# Altium PCB PCB2.PcbDoc
Units mm, origin at the board's own origin, x right, y up, seen from the top; angles counter-clockwise.
Board outline 101.25 x 88.75 mm, 2 copper layers (Top Layer, Bottom Layer); 27 components, 43 nets, 144 pads, 11 vias.
Unrouted connection lines stored in the file: 2.
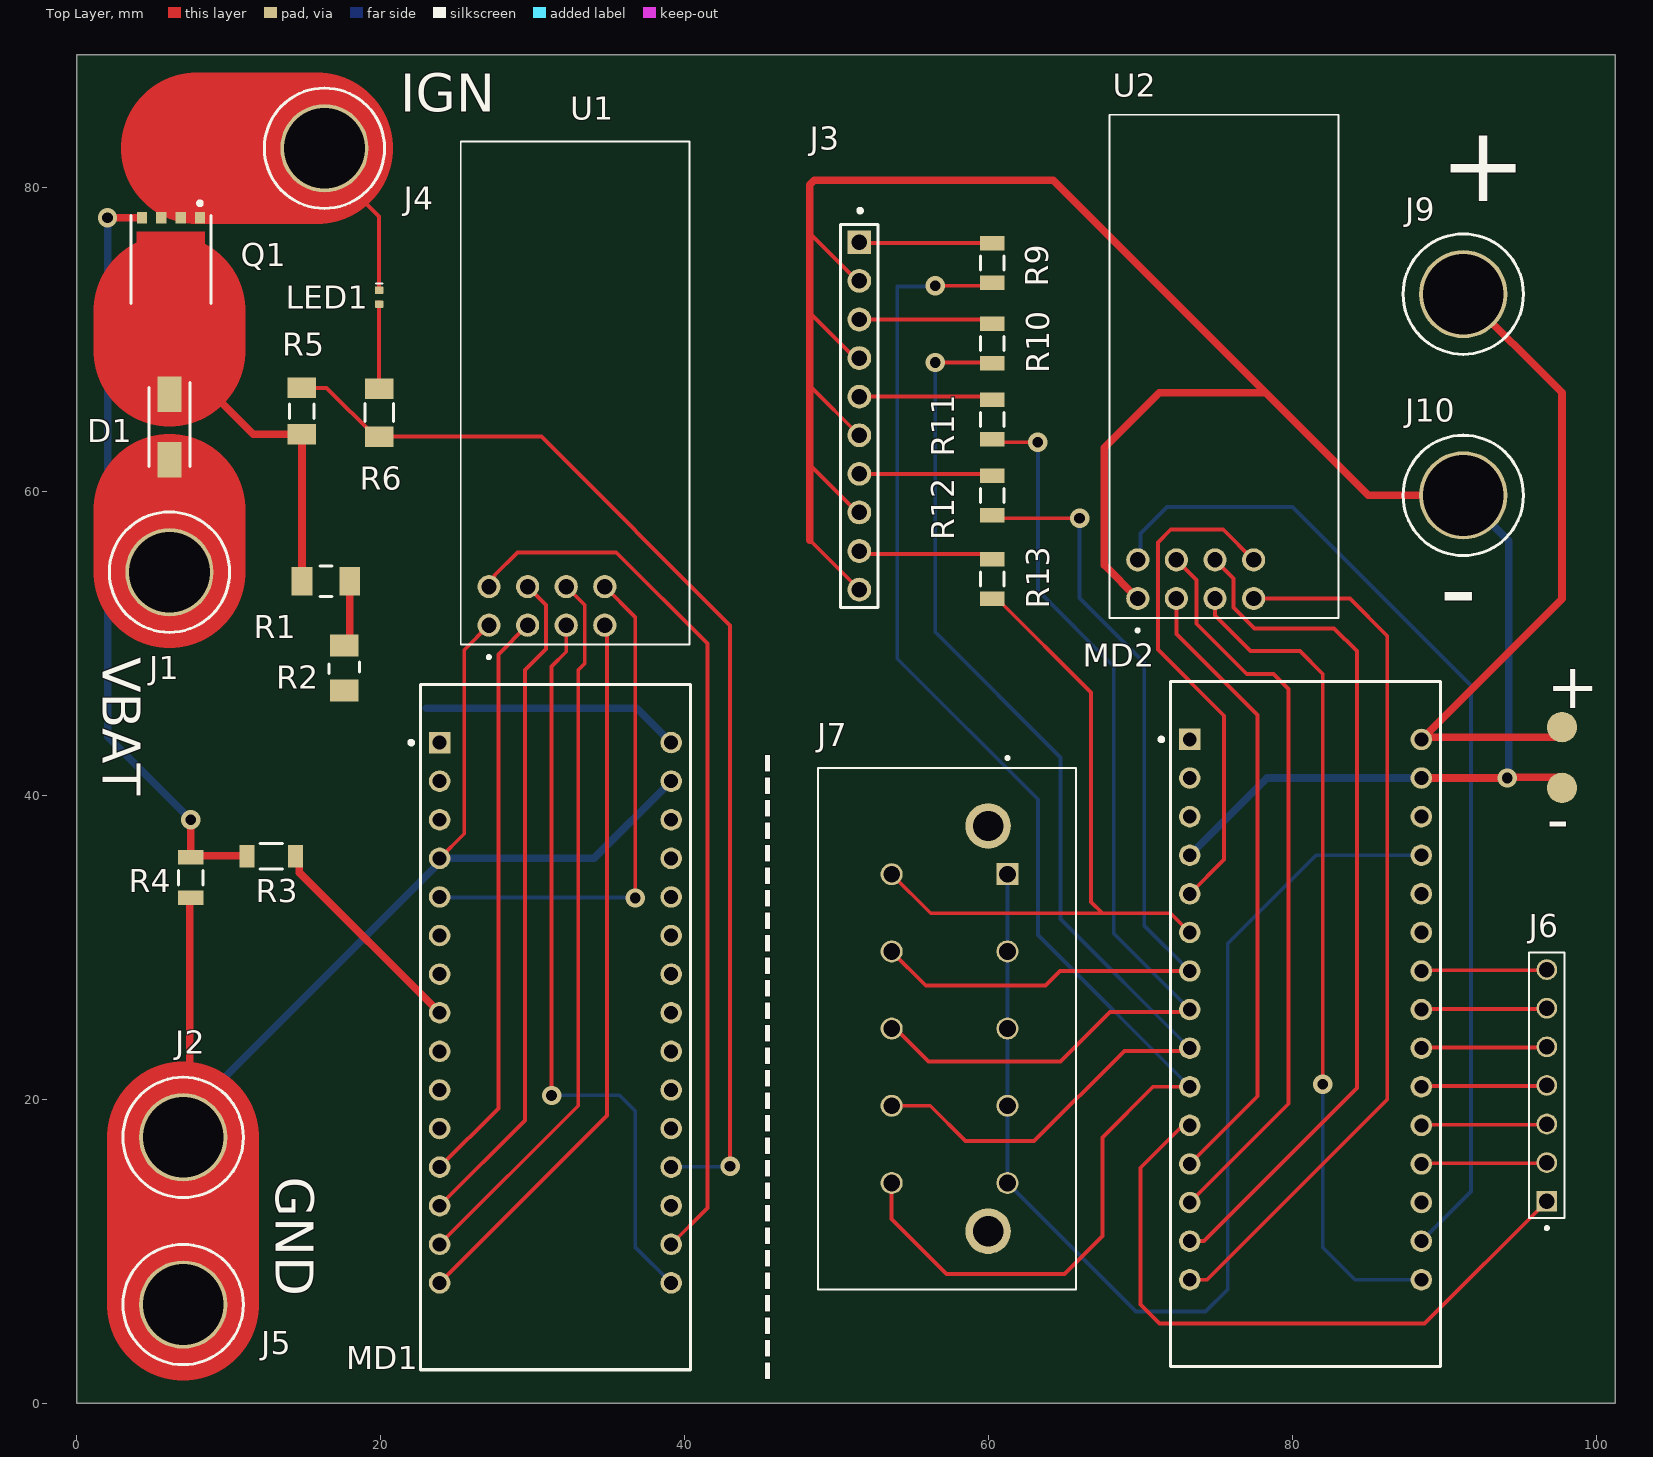
[diagram p0: Top Layer view]
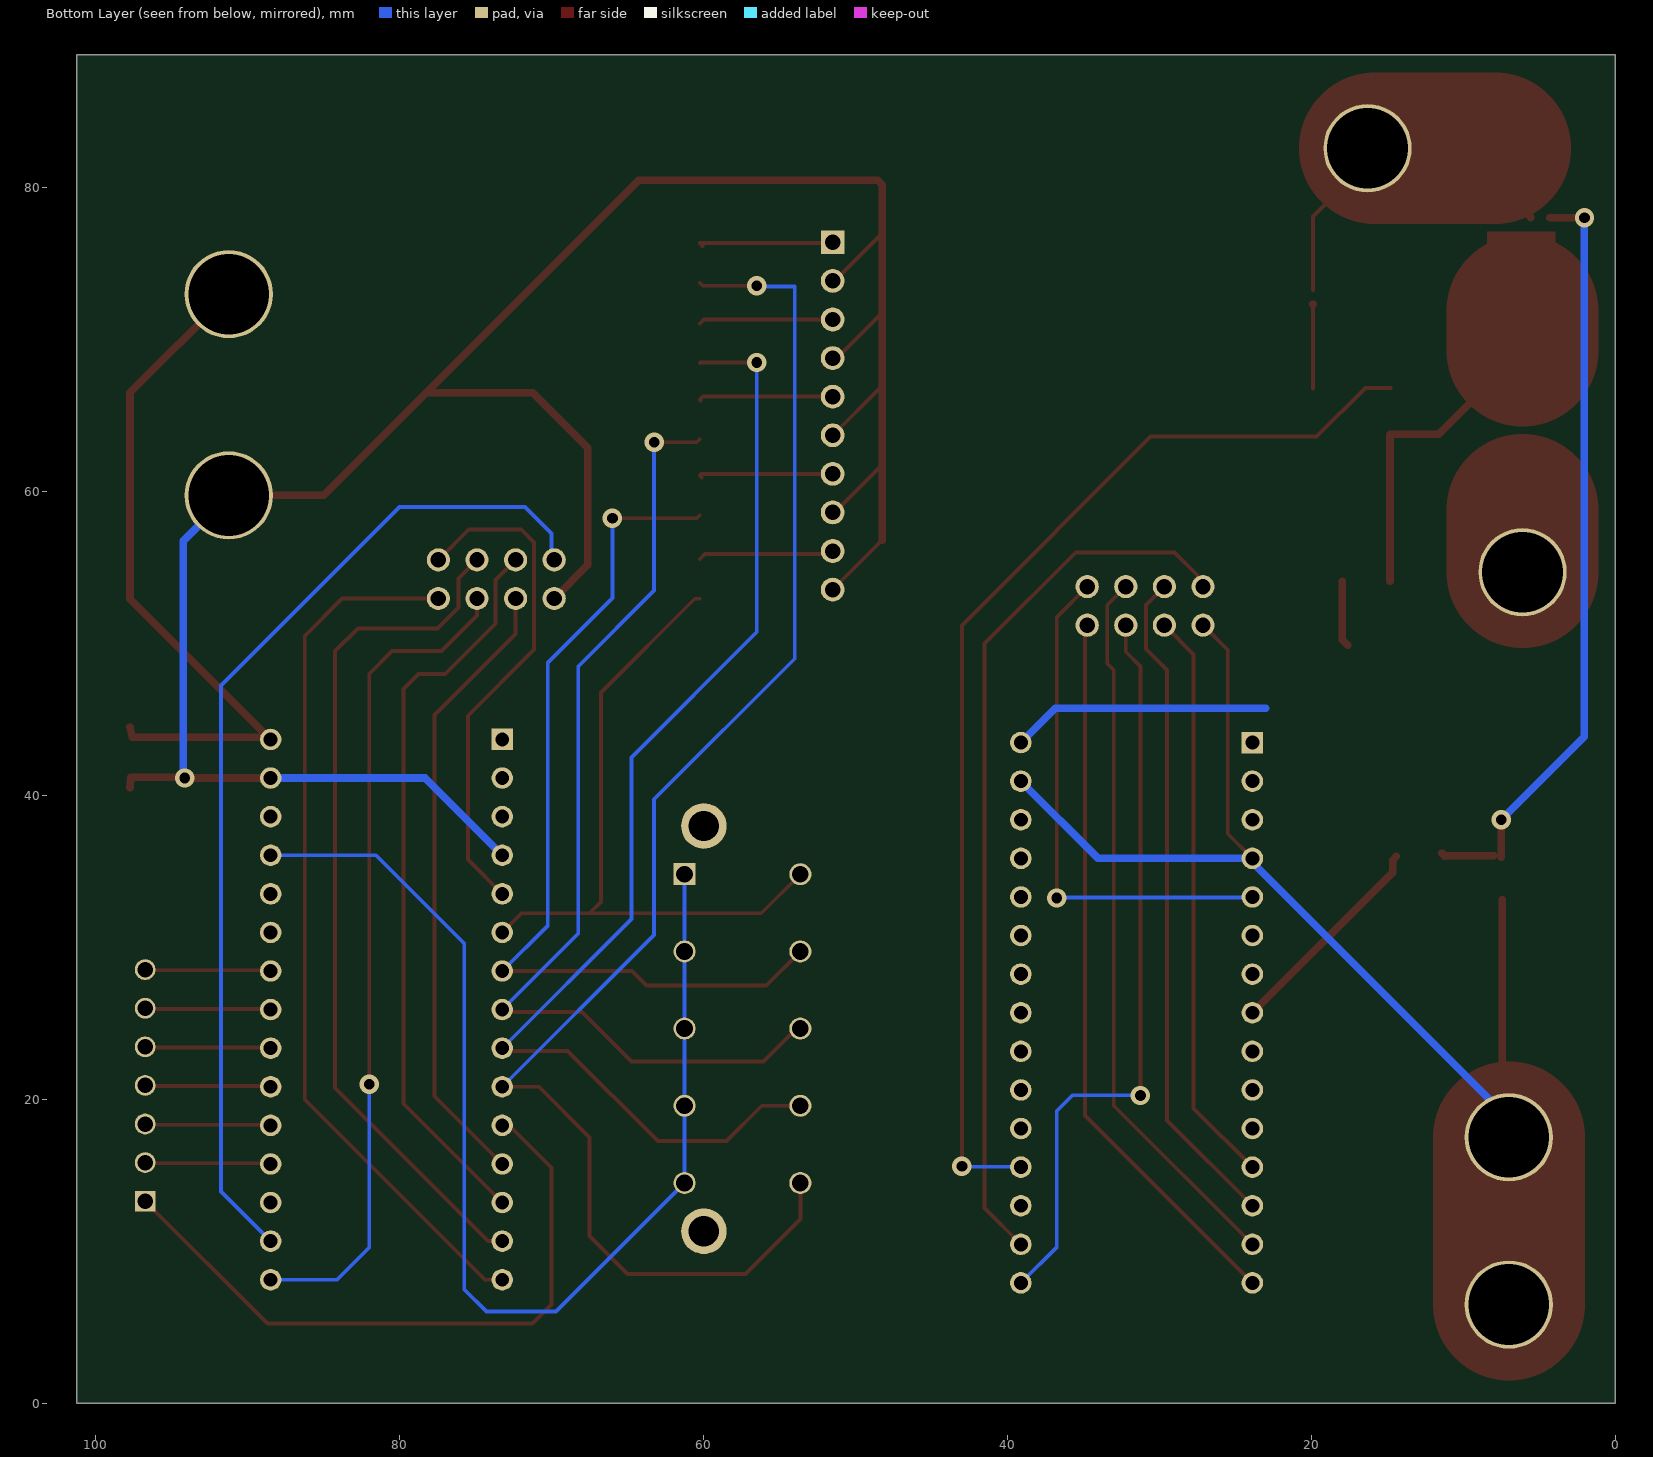
[diagram p1: Bottom Layer view, seen from below]
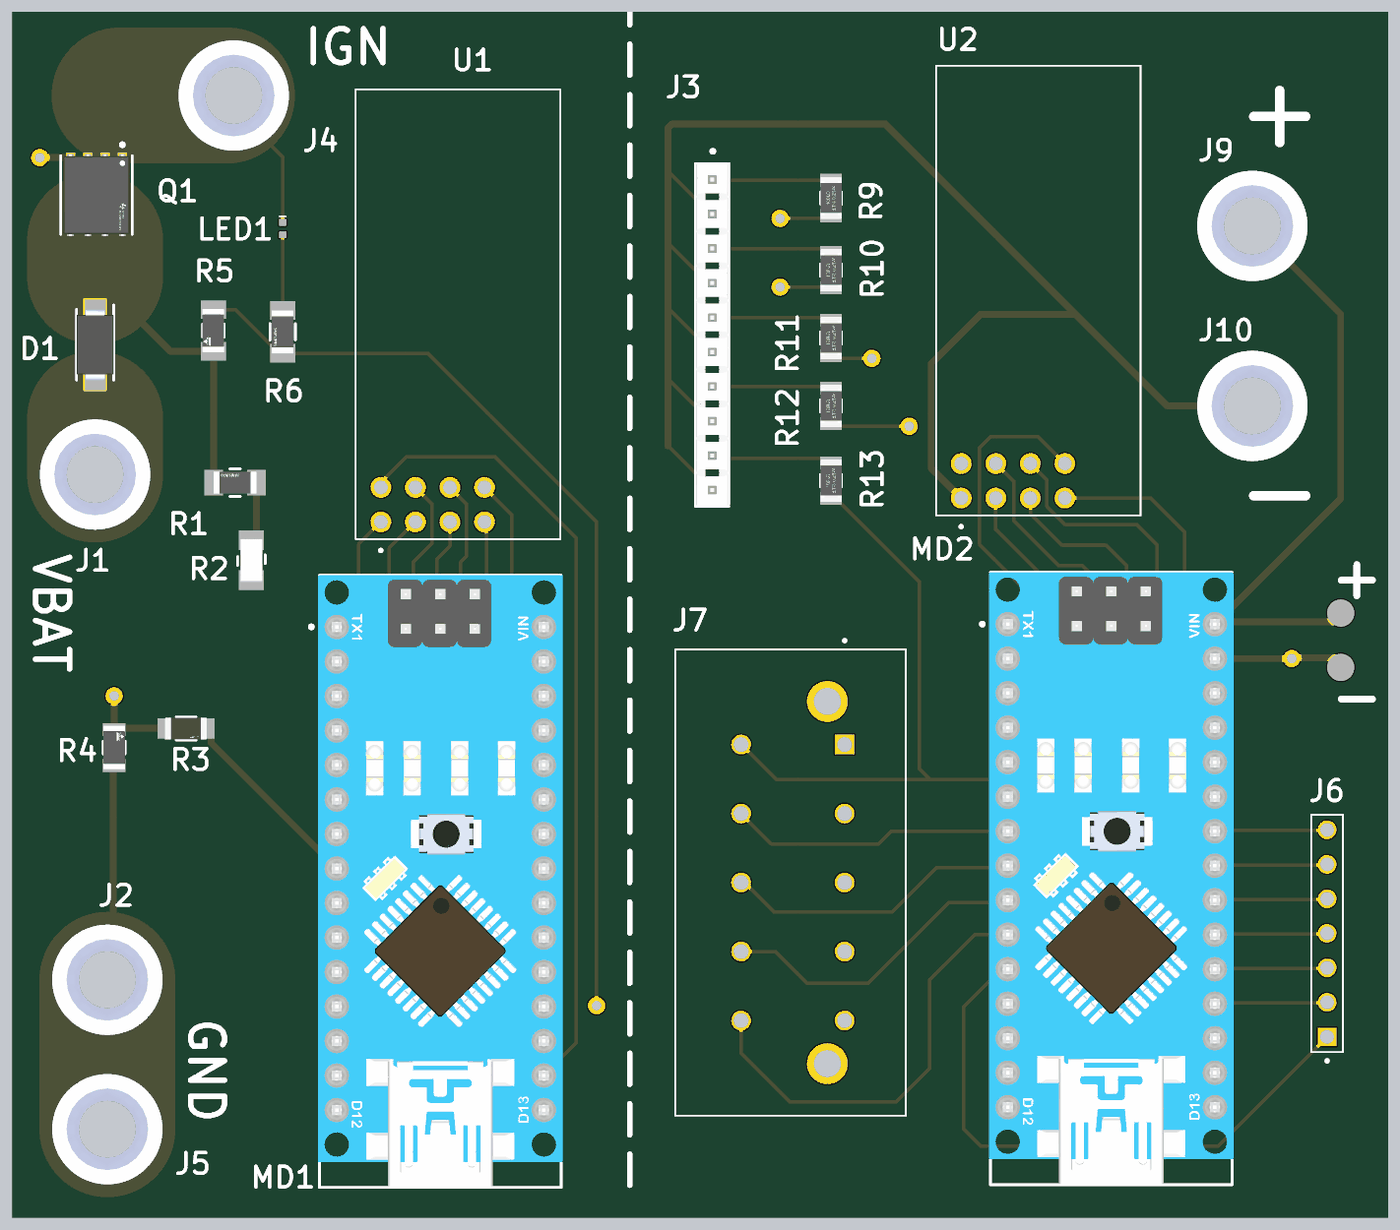
[diagram p2: 3D render of the assembled board from above, using the file's embedded part models]

## Layer stack, top to bottom
Top Solder: solder mask 0.0102, Solder Resist, Dk 3.5
Top Layer: signal copper 0.0356
Dielectric 1: dielectric 0.32, FR-4, Dk 4.8
Bottom Layer: signal copper 0.0356
Bottom Solder: solder mask 0.0102, Solder Resist, Dk 3.5

## Board outline
0,0 101.25,0 101.25,88.75 0,88.75

## Design rules (kind name [scope] priority, off if disabled: settings)
Clearance [All] p1: gap=0.254 ignorepadtopadclearanceinfootprint=FALSE except(0.127: Arc-Arc Arc-Track Track-Track SMDPad-SMDPad; 0.2: Arc-SMDPad Track-SMDPad; 0.33: Arc-THPad Track-THPad; 0.5: SMDPad-THPad SMDPad-Hole THPad-THPad THPad-Via THPad-Hole Via-Via Via-Hole)
HoleSize [All] p1: absolutevalues=TRUE maxlimit=10 minlimit=0.025 maxpercent=80.000 minpercent=20.000
PolygonConnect [All] p1: connectstyle=Direct reliefconductorwidth=0.254 reliefentries=4 polygonreliefangle="90 Angle" airgapwidth=0.254
RoutingVias [All] p1: holewidth=0.711 width=1.27 viastyle="Through Hole" minholewidth=0.711 minwidth=1.27 maxholewidth=0.711 maxwidth=1.27
SolderMaskExpansion [All] p1: expansion=0.102 istentingtop=FALSE
SupplyNets "Schematic Supply Nets_5" [InNet('GND')] p1: voltage=0.000
SupplyNets "Schematic Supply Nets_4" [InNet('+12')] p2: voltage=0.000
SupplyNets "Schematic Supply Nets_3" [InNet('VCC')] p3: voltage=0.000
SupplyNets "Schematic Supply Nets_2" [InNet('GND2')] p4: voltage=0.000
SupplyNets "Schematic Supply Nets_1" [InNet('VSS')] p5: voltage=0.000
SupplyNets "Schematic Supply Nets" [InNet('LOAD')] p6: voltage=0.000
Width [All] p1: maxlimit=10 minlimit=0.254 preferedwidth=1 minimp=50.000000 maximp=50.000000 favimp=50.000000
29 further rules are at their usual default settings.

## Classes and differential pairs
component class Sheet2: J3 J6 J7 J9 J10 MD2 R9 R10 R11 R12 R13 U2
component class Sheet1: D1 J1 J2 J4 J5 LED1 MD1 Q1 R1 R2 R3 R4 R5 R6 U1

## Components (designator, comment, footprint, x,y, rotation, side; value= is the part's Value field where it differs from the comment)
D1 "SS14" DIOM5227X270N 6.1,64.25 r270 top
J1 "575-8" KSTN-575-8 6.1,54.7 r0 top
J2 "575-8" KSTN-575-8 7,17.5 r0 top
J3 "4-644456-0" FP-4-644456-0-MFG 51.5,64.98 r90 top
J4 "575-8" KSTN-575-8 16.3,82.6 r0 top
J5 "575-8" KSTN-575-8 7,6.5 r0 top
J6 "3-644456-7" TE_3-644456-7 96.75,13.3 r90 top
J7 "3-917657-3" TE_3-917657-3 61.25,34.82 r270 top
J9 "575-8" KSTN-575-8 91.25,73 r0 top
J10 "575-8" KSTN-575-8 91.25,59.75 r0 top
LED1 "QBLP595-IB" QTB-QBLP595_V 19.9,72.8 r270 top
MD1 "A000005" FP-A000005-MFG 31.5,24.75 r0 top
MD2 "A000005" FP-A000005-MFG 80.87,24.957 r0 top
Q1 "CSD17579Q5A" FP-DQJ0008A-MFG 6.2,75.275 r270 top
R1 "RC3216F201CS" FP-RC3216-IPC_A 16.4,54.1 r180 top value=200
R2 "MCA12060C1001FP500" FP-MCA1206-IPC_A 17.6,48.4 r90 top value=1k
R3 "RT1206FRE07499RL" FP-RT1206-MFG 12.8,36 r0 top value=499R
R4 "CRCW120610K0FKEA" FP-CRCW1206-e3-IPC_C 7.5,34.6 r90 top
R5 "CRCW1206470RJNEA" FP-CRCW1206-e3-IPC_A 14.8,65.3 r270 top
R6 "RC3216J122CS" FP-RC3216-IPC_A 19.9,65.2 r270 top
R9 "CRGCQ1206J330R" FP-CRGCQ1206-IPC_C 60.25,75.051 r90 top value=330Ω
R10 "CRGCQ1206J330R" FP-CRGCQ1206-IPC_C 60.25,69.75 r90 top value=330Ω
R11 "CRGCQ1206J330R" FP-CRGCQ1206-IPC_C 60.25,64.75 r90 top value=330Ω
R12 "CRGCQ1206J330R" FP-CRGCQ1206-IPC_C 60.25,59.75 r90 top value=330Ω
R13 "CRGCQ1206J330R" FP-CRGCQ1206-IPC_C 60.25,54.25 r90 top value=330Ω
U1 "NRF24L01P-MODULE-PCB" XCVR_NRF24L01P-MODULE-PCB 32.799,66.494 r90 top
U2 "NRF24L01P-MODULE-PCB" XCVR_NRF24L01P-MODULE-PCB 75.5,68.25 r90 top

## Footprints (in the part's own frame and the unit in brackets; to place one, negate y for a bottom-side part, rotate by r counter-clockwise, add the part's x,y. Pads: shape width x height; smd on the part's side, far side on the other; paste and mask are expansions set on the pad)
DIOM5227X270N [mm]
  rect 2.35x1.55 smd: 1(-2.15,0) 2(2.15,0)
  silkscreen extent -2.93,-1.36 2.6,1.36, body extent -2.6,-1.36 2.6,1.36, height 2.5
FP-4-644456-0-MFG [mil]
  rect 61.65x61.65 hole 40 paste-99999 mask+0: 1(450,0)
  round 61.65 hole 40 paste-99999 mask+0: 2(350,0) 3(250,0) 4(150,0) 5(50,0) 6(-50,0) 7(-150,0) 8(-250,0) 9(-350,0) 10(-450,0)
  silkscreen extent -497,-49 537,49, body extent -500,-52 500,52, height 10
FP-A000005-MFG [mil]
  rect 55.67x55.67 hole 35.98 paste-99999 mask+0: 1(-300,737.5)
  round 55.67 hole 35.98 paste-99999 mask+0: 2(-300,637.5) 3(-300,537.5) 4(-300,437.5) 5(-300,337.5) 6(-300,237.5) 7(-300,137.5) 8(-300,37.5) 9(-300,-62.5) 10(-300,-162.5) 11(-300,-262.5) 12(-300,-362.5) 13(-300,-462.5) 14(-300,-562.5) 15(-300,-662.5) 16(300,-662.5) 17(300,-562.5) 18(300,-462.5) 19(300,-362.5) 20(300,-262.5) 21(300,-162.5) 22(300,-62.5) 23(300,37.5) 24(300,137.5) 25(300,237.5) 26(300,337.5) 27(300,437.5) 28(300,537.5) 29(300,637.5) 30(300,737.5)
  silkscreen extent -379,-888 350,887, body extent -354,-891 354,891, height 10
FP-CRCW1206-e3-IPC_A [mm]
  rect 1.356x1.858 smd paste+0 mask+0: 1(-1.526,0) 2(1.526,0)
  silkscreen extent -0.47,-0.8 0.47,0.8, body extent -2.7,-1.43 2.7,1.43, height 0.25
FP-CRCW1206-e3-IPC_C [mm]
  rect 0.956x1.658 smd paste+0 mask+0: 1(-1.326,0) 2(1.326,0)
  silkscreen extent -0.47,-0.8 0.47,0.8, body extent -1.9,-0.97 1.9,0.97, height 0.25
FP-CRGCQ1206-IPC_C [mm]
  rect 0.956x1.61 smd paste+0 mask+0: 1(-1.301,0) 2(1.301,0)
  silkscreen extent -0.45,-0.78 0.45,0.78, body extent -1.88,-0.95 1.88,0.95, height 0.25
FP-DQJ0008A-MFG [mm]
  rect 0.75x0.675 smd paste-1000 mask+0: 1(-2.752,1.905) 2(-2.752,0.635) 3(-2.752,-0.635) 4(-2.752,-1.905)
  round 0.025 smd paste-1000 mask+0: 5-6-7-8(0.275,-0.1)
  Top Layer region: -0.614,2.226 -0.614,2.226 3.131,2.226 3.131,1.551 2.476,1.551 2.476,0.956 3.131,0.956 3.131,0.281 2.476,0.281 2.476,-0.314 3.131,-0.314 3.131,-0.989 2.476,-0.989 2.476,-1.584 3.131,-1.584 3.131,-2.259 -1.819,-2.259 -1.819,2.226
  silkscreen extent -3.82,-2.63 2.9,2.63, body extent -3.23,-2.6 3.23,2.6, height 0.25
FP-MCA1206-IPC_A [mm]
  rect 1.456x1.858 smd paste+0 mask+0: 1(-1.476,0) 2(1.476,0)
  silkscreen extent -0.38,-1.02 0.38,1.02, body extent -2.7,-1.43 2.7,1.43, height 0.25
FP-RC3216-IPC_A [mm]
  rect 1.355x1.858 smd paste+0 mask+0: 1(-1.576,0) 2(1.576,0)
  silkscreen extent -0.38,-1.02 0.38,1.02, body extent -2.75,-1.43 2.75,1.43, height 0.25
FP-RT1206-MFG [mm]
  rect 1x1.5 smd paste+0 mask+0: 1(-1.6,0) 2(1.6,0)
  silkscreen extent -0.73,-0.85 0.72,0.85, body extent -2.2,-0.95 2.2,0.95, height 0.25
KSTN-575-8 [mm] "Banana Jack, Dia 7.92 mm"
  round 5.81 hole 5.31: 1(0,0)
  silkscreen extent -3.96,-3.96 3.96,3.96, body extent -3.96,-3.96 3.96,3.96, height 2.36
QTB-QBLP595_V [mm] "SMD, 2-Leads, Body 1x0.5mm"
  rrect25% 0.5x0.55 smd: 1(-0.455,0) 2(0.455,0)
  silkscreen extent -0.9,-0.2 -0.9,0.2, body extent -0.5,-0.25 0.5,0.25, height 0.5
TE_3-644456-7 [mm]
  rect 1.37x1.37 hole 1.02: 1(0,0)
  round 1.37 hole 1.02: 2(2.54,0) 3(5.08,0) 4(7.62,0) 5(10.16,0) 6(12.7,0) 7(15.24,0)
  silkscreen extent -1.87,-1.17 16.36,1.17
TE_3-917657-3 [mm]
  rect 1.45x1.45 hole 1.1: A1(0,0)
  round 1.45 hole 1.1: A2(5.08,0) A3(10.16,0) A4(15.24,0) A5(20.32,0) B1(0,-7.62) B2(5.08,-7.62) B3(10.16,-7.62) B4(15.24,-7.62) B5(20.32,-7.62)
  round 3 hole 2: S1(-3.175,-1.27) S2(23.495,-1.27)
  silkscreen extent -7.75,-12.47 27.32,4.5
XCVR_NRF24L01P-MODULE-PCB [mil]
  round 60 hole 40: 1(-601.75,223.19) 2(-501.75,223.19) 3(-601.75,123.19) 4(-501.75,123.19) 5(-601.75,23.19) 6(-501.75,23.19) 7(-601.75,-76.81) 8(-501.75,-76.81)
  silkscreen extent -688,-297 652,296

## Part data
D1: library part CMP-004-00031-2, "Diode Schottky 40 V 1A Surface Mount DO-214AC (SMA)", Case/Package="SMA-2 ON Semiconductor", Check_prices=https://www.snapeda.com/parts/SS14/Onsemi/view-part/?ref=eda, Component Type=Standard, Design Item ID=SS14, MF="ON Semiconductor", MP=SS14, Pins=2, SnapEDA_Link=https://www.snapeda.com/parts/SS14/Onsemi/view-part/?ref=snap, Source=SS14.SchLib
J1 J2 J4 J5 J9 J10: library part CMP-1672-00007-5, "Non-Insulated Jack, Through Hole, RoHS, Bulk", Manufacturer=Keystone, ComponentLink1Description="Manufacturer URL", ComponentLink1URL=http://www.keyelco.com/, ComponentLink2Description=Datasheet, ComponentLink2URL=http://www.keyelco.com/product-pdf.cfm?p=2379, DatasheetVersion="Rev. B, 11/1994", Mounting Technology="Through Hole", PackageDescription="1-Pin Through Hole Device, Dia 7.92 mm", PackageReference=575-8
J3: library part CMP-015-000000-2, "Conn Unshrouded Header HDR 10 POS 2.54mm Solder ST Top Entry Thru-Hole Bag/Box", Color=Natural, Contact Current Rating=5A, Contact Resistance=6mR, Flammability Rating="UL94 V-0", Max Operating Temperature=221°C, Max Voltage Rating (AC)=250V, Min Operating Temperature=-67°C, Package=None, Package Quantity=500, Approvals=CSA, Availability=Unavailable, Backwall/Post Interruptions="No (Without)", Circuit Application=Signal, Component Type=Standard, Connector System=Wire-to-Board, Connector Type=Plug,Header,Pin, Contact Gender=Male, Contact Material="Copper Alloy", Contact Mating Length=7.49mm, Contact Plating=Tin,Matte, Contact Retention="No (Without)", Contact Shape=Square, Contact Style=Straight, Contact Type="Male Pin", Current Rating=5A, Depth=2.33mm, Design Item ID=4-644456-0, ELV=Compliant, Gender=Male, Height=10.03mm, Housing Color=Natural, Housing Material=Polyester, Lead Free="Lead Free", Length=25.1mm, Mating Alignment="No (Without)", Mating Retention="No (Without)", Mounting Technology="Through Hole", MP=4-644456-0, Number of Contacts=10, Number of Positions=10, Number of Rows=1, Operating Supply Voltage=250V, Orientation=Straight, Packaging=Bag, PCB Mount Alignment="No (Without)", PCB Mount Retention=Without, PCB Mounting Orientation=Vertical, PCB Thickness=0.063inch, Pin Count=10, Pitch=2.54mm, Plating=Tin, Plating Thickness=1.27um, Price=None, Radiation Hardening=No, RoHS Compliant=Yes, Sealable="No (Without)", Series=MTA-100, Shrouded="No (Without)", Source=4-644456-0.SchLib, Strain Relief="No (Without)", Tail Length=0.11inch, Termination=Solder, Underplate Material=Nickel, Voltage Rating=250V, Voltage Rating (AC)=250V
J6: library part CMP-002-00071-2, "Header; 0.1 in. (Centerline); White (Housing); Polyester; 7; UL 94V-0", Case/Package=None, Max Operating Temperature=221°C, Min Operating Temperature=-67°C, Voltage Rating=250V, Component Type=Standard, Connector Type=Plug,Header,Pin, Design Item ID=3-644456-7, Digi-Key_Part_Number=A31117-ND, DigiKey-Purchase-URL=https://snapeda.com/shop?store=DigiKey&id=554533, EU_RoHS_Compliance=Compliant, Gender=Male, MF="TE Connectivity", Mounting Technology="Through Hole", Mouser-Purchase-URL=https://snapeda.com/shop?store=Mouser&id=554533, MP=3-644456-7, Pins=7, RoHS Compliant=Yes, SnapEDA_Link=https://www.snapeda.com/parts/3-644456-7/TE%20Connectivity%20AMP%20Connectors/view-part/554533/?ref=snap, Source=3-644456-7.SchLib
J7: library part CMP-007-000000-1, Package=None, Availability=Unavailable, Component Type=Standard, Design Item ID=3-917657-3, MP=3-917657-3, Pin Count=12, Price=None, Source=3-917657-3.SchLib
LED1: library part CMP-007-00042-3, "Chip LED 0402, Blue, 0.02 A, 3.1 to 3.7 V, -40 to 80 degC, 2-Pin SMD, RoHS, Tape and Reel", Case/Package=0402, Colour=Blue, Mounting Technology=SMT, Pins=2, RoHS Compliant=Yes
MD1 MD2: library part CMP-189986-000002-1, "ARDUINO NANO ATMEGA328 EVAL BRD", Operating Supply Voltage=12V, Package Quantity=50, Core Architecture=AVR, Data Bus Width=8b, Evaluation Kit=Yes, Height=0.25inch, Interface=I2C, Length=7inch, Number of Bits=8, Packaging=Bulk, REACH SVHC="No SVHC", Series="AVR® ATmega", Weight=0.358383oz, Width=5inch
Q1: library part CMP-013-00034-3, "30V, N ch NexFET MOSFET, single SON5x6, 13.3mOhm 8-VSONP", Case/Package="VSONP-8 Texas Instruments", Peak Reflow Temperature (Cel)=260°C, Availability="In Stock", Check_prices=https://www.snapeda.com/parts/CSD17579Q5A/Texas+Instruments/view-part/?ref=eda, Component Type=Standard, Design Item ID=CSD17579Q5A, JESD-609 Code=e3, MF="Texas Instruments", Moisture Sensitivity Level=1, MP=CSD17579Q5A, Pins=8, Price=None, Purchase-URL=https://pricing.snapeda.com/search/part/CSD17579Q5A/?ref=eda, Reach SVHC Compliant=No, RoHS Compliant=Yes, SnapEDA_Link=https://www.snapeda.com/parts/CSD17579Q5A/Texas+Instruments/view-part/?ref=snap, Source=CSD17579Q5A.SchLib, Terminal Finish=Tin
R1: library part CMP-009-00180-1, "Fixed Resistor, Metal Glaze/thick Film, 0.25W, 200ohm, 200V, 1% +/-Tol, 100ppm/Cel, Surface Mount, 1206", Case/Package=1206, Max Operating Temperature=155°C, Min Operating Temperature=-55°C, Power=250mW, Tolerance=1%, Mounting Technology="Surface Mount", Pins=2, RoHS Compliant=Yes
R2: library part CMP-009-00181-2, "Fixed Resistor, Thin Film, 0.25W, 1000ohm, 200V, 1% +/-Tol, 50ppm/Cel, Surface Mount, 1206", Case/Package=1206, Max Operating Temperature=125°C, Min Operating Temperature=-55°C, Power=250mW, Tolerance=1%, Mounting Technology="Surface Mount", Pins=2, RoHS Compliant=Yes
R3: library part CMP-2003-04117-2, "RES SMD 499 OHM 1% 1/4W 1206", Manufacturer=Yageo, Package=RT1206, Power Rating=0.25W, Resistance=499Ω, Temperature="-55°C to +155°C", Temperature Coefficient="50 ppm/°C", Temperature Range High=+155°C, Temperature Range Low=-55°C, Tolerance=0.0002, Voltage Rating=200V, Automotive=No, Category=Res, ComponentLink2Description=Datasheet, ComponentLink2URL=http://www.yageo.com/documents/recent/PYu-RT_1-to-0.01_RoHS_L_9.pdf, Composition="Thin Film", Device Class L1="Passive Components", Device Class L2=Resistors, Device Class L3="Chip SMD Resistors", Digikey Description="RES SMD 499 OHM 1% 1/4W 1206", Footprint Url=http://www.yageo.com/exep/pages/download/literatures/PYu-R_Mount_10.pdf, Height=0.65mm, Ipc Land Pattern Name=RESC310160X55, Lead Free=Yes, Manufacturer Part Number=RT1206FRE07499RL, Mouser Description="Res SMD 499 Ohm 1% 1/8W 1206", Octopart=https://octopart.com/rt1206fre07499rl-yageo-1402563, RoHS=TRUE, Series=RT
R4: library part CMP-2003-04807-2, "RES Thick Film, 10kΩ, 1%, 0.25W, 100ppm/°C, 1206", Case Code (Imperial)=1206, Case Code (Metric)=3216, Max Operating Temperature=155°C, Max Power Dissipation=250mW, Min Operating Temperature=-55°C, Package Quantity=10, Resistance=10kR, Temperature Coefficient=100ppm/°C, Tolerance=1%, Voltage Rating=200V, Case/Package=1206, Composition="Thick Film", Contact Plating=Tin, Depth=1.6mm, Features="Automotive AEC-Q200", Height=0.55mm, Lead Free="Lead Free", Length=3.2mm, Military Standard=Not, Number of Pins=2, Number of Terminations=2, Packaging="Tape and Reel", Power Rating=250mW, Radiation Hardening=No, Termination=SMD/SMT, Voltage Rating (DC)=200V, Weight=0.000353oz, Width=0.063inch, Working Voltage=200V
R5: library part CMP-2003-02207-2, "RES Thick Film, 470Ω, 5%, 0.25W, 200ppm/°C, 1206", Case Code (Imperial)=1206, Case Code (Metric)=3216, Max Operating Temperature=155°C, Min Operating Temperature=-55°C, Package Quantity=5000, Power Rating=250mW, Resistance=470R, Temperature Coefficient=200ppm/°C, Tolerance=5%, Voltage Rating=200V, Case/Package=1206, Composition="Thick Film", Contact Plating=Tin, Depth=1.6mm, Height=0.55mm, Lead Free="Lead Free", Length=3.2mm, Military Standard=Not, Packaging="Tape and Reel", Radiation Hardening=No, Termination=SMD/SMT, Voltage Rating (DC)=200V, Weight=0.000353oz, Width=1.6mm
R6: library part CMP-13261-002668-1, "Res Thick Film 1206 1.2kΩ 5% 0.25W ±100ppm/°C Molded SMD T/R", Case Code (Imperial)=1206, Case Code (Metric)=3216, Max Operating Temperature=155°C, Max Power Dissipation=250mW, Min Operating Temperature=-55°C, Resistance=1.2kR, Temperature Coefficient=100ppm/°C, Tolerance=5%, Case/Package=1206, Composition="Thick Film", Contact Plating=Tin, Depth=1.6mm, Features="Moisture Resistant", Height=0.026inch, Length=3.2mm, Military Standard=Not, Number of Terminations=2, Packaging="Tape and Reel", Radiation Hardening=No, Width=0.063inch
R9 R10 R11 R12 R13: library part CMP-03211-006050-1, "CRGCQ1206 330Ω 0.25W 5% ±100ppm/°C 200V", Ambient Temperature Range High=+70°C, Manufacturer="TE Connectivity", Package=CRGCQ1206, Power Rating=0.25W, Resistance=330Ω, Temperature="-55°C to +155°C", Temperature Coefficient=±100ppm/°C, Temperature Range High=+155°C, Temperature Range Low=-55°C, Tolerance=0.05, Voltage Rating=200V, Automotive=Yes, Automotive Grade="Grade 572", Category=Res, ComponentLink2Description=Datasheet, ComponentLink2URL=https://www.te.com/commerce/DocumentDelivery/DDEController?Action=showdoc&DocId=Data+Sheet%7F1773204-3%7F1%7Fpdf%7FEnglish%7FENG_DS_1773204-3_1.pdf%7F4-2176347-581, Composition="Thick Film", Device Class L1="Passive Components", Device Class L2=Resistors, Device Class L3="Chip SMD Resistors", Height=0.65mm, Ipc Land Pattern Name=RESC310155X55, Lead Free=Yes, Manufacturer Part Number=CRGCQ1206J330R, Octopart=https://octopart.com/crgcq1206j330r-te+connectivity-91018326, RoHS=TRUE, Series=CRGCQ
U1 U2: library part CMP-005-000000-1, "- Transceiver For Use With nRF24L01+", Package=None, Availability=Bad, Component Type=Standard, Design Item ID=NRF24L01P-MODULE-PCB, MF="Nordic Semiconductor", Mouser-Purchase-URL=https://snapeda.com/shop?store=Mouser&id=230534, MP=NRF24L01P-MODULE-PCB, Pin Count=8, Price=None, SnapEDA_Link=https://www.snapeda.com/parts/NRF24L01P-MODULE-PCB/Nordic%20Semiconductor%20ASA/view-part/230534/?ref=snap, Source=NRF24L01P-MODULE-PCB.SchLib

## Free pads (board coordinates)
  round 2 smd: 2(97.75,40.5) 2(97.75,44.5)

## Via types
v1: diameter 1.27, hole 0.711, Top Layer to Bottom Layer, 11 vias

## Nets (pads, with @x,y where several pads share a name; then routed paths per layer and width w, separated by ;. In a path a pad name is that pad's centre, name@x,y a point inside that pad or via, vN(x,y) a via of type N, cw(c..) or ccw(c..) an arc to the next point about the centre after c; other vN are vias at no path point)
+12: D1.1 Q1.5-6-7-8 R1.2 R5.2 | length 23.3
  Top Layer w0.5: 6.1,69.3 11.626,63.774 R5.2 14.824,63.75 R1.2
  Top Layer w10: 6.1,69.3 6.1,71.9
Cont: MD1.19 R5.1 R6.2 | length 74.2
  Top Layer w0.254: R5.1 16.447,66.826 19.648,63.624 R6.2 30.576,63.624 43,51.2 v1(43,15.6)
  Bottom Layer w0.254: MD1.19 39.149,15.571 42.971,15.571 v1(43,15.6)
GND: J2.1 J5.1 MD1.4 MD1.29 R2.1 R4.1 U1.1 | length 86.2
  Top Layer w0.254: MD1.4 25.5,37.482 25.5,49.58 U1.1
  Top Layer w0.5: J2.1 7.421,17.921 R4.1@7.421,33.146
  Top Layer w10: J5.1 J2.1
  Bottom Layer w0.5: J2.1 7,18.735 23.88,35.615 MD1.4 34.04,35.863 MD1.29
GND2: J3.2 J3.4 J3.6 J3.8 J3.10 J10.1 MD2.4 MD2.29 pad.2@97.75,40.5 U2.1 | length 168
  Top Layer w0.254: 48.25,56.8 J3.10 ; 48.25,61.75 51.37,58.63 J3.8 ; 48.25,67 48.25,66.96 J3.6 ; 48.25,71.75 51.21,68.79 J3.4 ; 48.25,77 51.38,73.87 J3.2
  Top Layer w0.5: 48.25,56.8 48.25,61.75 48.25,66.96 ; 48.25,67 48.25,71.75 48.25,77 48.25,80.207 48.543,80.5 64.25,80.5 78.25,66.5 ; U2.1 67.625,55.172 67.625,62.875 71.25,66.5 78.25,66.5 ; MD2.29 v1(94.15,41.15) 94.2,41.2 97.7,41.2 pad.2@97.75,40.5 ; J10.1 85,59.75 78.25,66.5
  Bottom Layer w0.5: MD2.4 78.33,41.15 MD2.29 ; J10.1 94.25,56.75 94.25,41.25 v1(94.15,41.15)
LOAD: J4.1 LED1.1 Q1.1 Q1.2 Q1.3 | length 23.3
  Top Layer w0.254: J4.1@15.7,80.046 17.954,80.046 19.9,78.1 LED1.1
  Top Layer w0.5: Q1.3 5.565,78.065 7.9,80.4 7.9,82.6
  Top Layer w10: 7.9,82.6 J4.1@15.8,82.6
NetD1_2: D1.2 J1.1 | length 4.1
  Top Layer w10: J1.1 6.1,58.8
NetJ3_1: J3.1 R9.2 | length 9
  Top Layer w0.254: J3.1 51.558,76.352 R9.2 R9.2@60.058,76.16
NetJ3_3: J3.3 R10.2 | length 8.9
  Top Layer w0.254: J3.3 59.971,71.33 R10.2
NetJ3_5: J3.5 R11.2 | length 8.9
  Top Layer w0.254: J3.5 60.051,66.25 R11.2 R11.2@60.199,66
NetJ3_7: J3.7 R12.2 | length 9
  Top Layer w0.254: J3.7 60.131,61.17 R12.2 R12.2@60.119,60.92
NetJ3_9: J3.9 R13.2 | length 9
  Top Layer w0.254: J3.9 51.688,55.902 59.899,55.902 R13.2
NetJ6_1: J6.1 MD2.11 | length 44
  Top Layer w0.254: MD2.11 73.028,18.068 72.568,18.068 70,15.5 70,6.5 71.25,5.25 88.7,5.25 J6.1
NetJ6_2: J6.2 MD2.19 | length 8.3
  Top Layer w0.254: MD2.19 88.535,15.795 96.705,15.795 J6.2
NetJ6_3: J6.3 MD2.20 | length 8.3
  Top Layer w0.254: MD2.20 88.535,18.335 96.705,18.335 J6.3
NetJ6_4: J6.4 MD2.21 | length 8.3
  Top Layer w0.254: MD2.21 88.535,20.875 96.705,20.875 J6.4
NetJ6_5: J6.5 MD2.22 | length 8.3
  Top Layer w0.254: MD2.22 88.535,23.415 96.705,23.415 J6.5
NetJ6_6: J6.6 MD2.23 | length 8.3
  Top Layer w0.254: MD2.23 88.535,25.955 96.705,25.955 J6.6
NetJ6_7: J6.7 MD2.24 | length 8.3
  Top Layer w0.254: MD2.24 88.535,28.495 96.705,28.495 J6.7
NetJ7_B1: J7.B1 MD2.6 R13.1 | length 45.1
  Top Layer w0.254: J7.B1 56.2,32.25 67.5,32.25 ; R13.1 60.577,52.949 66.75,46.776 66.75,33 67.5,32.25 ; MD2.6 71.99,32.25 67.5,32.25
NetJ7_B2: J7.B2 MD2.7 R12.1 | length 59.6
  Top Layer w0.254: J7.B2 55.87,27.5 63.75,27.5 64.7,28.45 MD2.7 ; R12.1 60.449,58.25 v1(66,58.25)
  Bottom Layer w0.254: v1(66,58.25) 66,53 70.25,48.75 70.25,31.45 MD2.7
NetJ7_B3: J7.B3 MD2.8 R11.1 | length 66.5
  Top Layer w0.254: J7.B3 53.887,24.66 56.047,22.5 64.75,22.5 68,25.75 73.09,25.75 MD2.8 ; R11.1 60.449,63.25 v1(63.25,63.25)
  Bottom Layer w0.254: v1(63.25,63.25) 63.25,53.5 68.25,48.5 68.25,30.91 MD2.8
NetJ7_B4: J7.B4 MD2.9 R10.1 | length 79
  Top Layer w0.254: J7.B4 56.17,19.58 58.5,17.25 63,17.25 68.945,23.195 73.075,23.195 MD2.9 ; v1(56.5,68.5) 60.199,68.5 R10.1
  Bottom Layer w0.254: v1(56.5,68.5) 56.5,50.75 64.75,42.5 64.75,31.87 MD2.9
NetJ7_B5: J7.B5 MD2.10 R9.1 | length 99.4
  Top Layer w0.254: J7.B5 53.63,12.12 57.25,8.5 65,8.5 67.5,11 67.5,17.5 70.83,20.83 MD2.10 ; v1(56.5,73.551) 60.051,73.551 R9.1
  Bottom Layer w0.254: v1(56.5,73.551) 56.449,73.5 54,73.5 54,49 63.25,39.75 63.25,30.83 MD2.10
NetLED1_2: LED1.2 R6.1 | length 5.6
  Top Layer w0.254: R6.1 LED1.2
  Top Layer w0.5: LED1.2@19.875,72.345 LED1.2
NetMD1_5: MD1.5 U1.8 | length 34.2
  Top Layer w0.254: U1.8 36.75,51.75 v1(36.75,33.25)
  Bottom Layer w0.254: MD1.5 23.916,33.286 36.714,33.286 v1(36.75,33.25)
NetMD1_8: MD1.8 R3.2 | length 14.2
  Top Layer w0.5: R3.2 14.65,35.75 14.65,34.932 MD1.8
NetMD1_12: MD1.12 U1.3 | length 38.1
  Top Layer w0.254: MD1.12 27.75,19.413 27.75,49 27.75,49.29 U1.3
NetMD1_13: MD1.13 U1.4 | length 44.2
  Top Layer w0.254: MD1.13 29.5,18.623 29.5,48.25 30.889,49.639 30.889,52.531 U1.4
NetMD1_14: MD1.14 U1.6 | length 47.7
  Top Layer w0.254: MD1.14 33,19.583 33,48.25 33.429,48.679 33.429,52.531 U1.6
NetMD1_15: MD1.15 U1.7 | length 47.7
  Top Layer w0.254: MD1.15 34.9,18.943 U1.7@34.9,51.06
NetMD1_16: MD1.16 U1.5 | length 49.6
  Top Layer w0.254: v1(31.25,20.25) 31.25,48.5 32.21,49.46 U1.5
  Bottom Layer w0.254: v1(31.25,20.25) 31.27,20.27 35.73,20.27 36.75,19.25 36.75,10.293 MD1.16
NetMD1_17: MD1.17 U1.2 | length 58.5
  Top Layer w0.254: U1.2 27.13,54.094 27.494,54.458 27.494,54.494 29,56 35.5,56 41.5,50 41.5,12.843 MD1.17
NetMD1_30: MD1.30 R1.1 R2.2 | length 21.4
  Top Layer w0.5: R2.2 17.976,50.252 R1.1
  Bottom Layer w0.5: 23,45.75 36.852,45.75 MD1.30
NetMD2_5: MD2.5 U2.8 | length 33.3
  Top Layer w0.254: MD2.5 75.5,35.78 75.5,45.25 71.152,49.598 71.152,56.652 72,57.5 75.457,57.5 U2.8
NetMD2_12: MD2.12 U2.3 | length 41.3
  Top Layer w0.254: U2.3 72.371,50.629 77.703,45.297 77.703,20.203 MD2.12
NetMD2_13: MD2.13 U2.4 | length 49.1
  Top Layer w0.254: U2.4 73.692,54.184 73.692,51.308 77,48 78.75,48 79.75,47 79.75,19.71 MD2.13
NetMD2_14: MD2.14 U2.6 | length 56.9
  Top Layer w0.254: MD2.14 73.269,10.689 74.189,10.689 84.25,20.75 84.25,49.5 82.75,51 77.5,51 76.13,52.37 76.13,54.287 U2.6
NetMD2_15: MD2.15 U2.7 | length 58.2
  Top Layer w0.254: MD2.15 74.38,8.13 86.25,20 86.25,50.5 83.784,52.966 U2.7
NetMD2_16: MD2.16 U2.5 | length 54.9
  Top Layer w0.254: U2.5 74.911,51.839 77.25,49.5 80.5,49.5 82,48 v1(82,21)
  Bottom Layer w0.254: v1(82,21) 82,10.25 84.12,8.13 MD2.16
NetMD2_17: MD2.17 U2.2 | length 67.1
  Bottom Layer w0.254: U2.2 70,55.674 70,57.25 71.75,59 80,59 91.75,47.25 91.75,13.93 MD2.17
NetQ1_4: Q1.4 R3.1 R4.2 | length 50.1
  Top Layer w0.5: v1(2.028,78.027) Q1.4 ; R4.2 v1(7.5,38.4) ; R4.2@8,36.026 11.174,36.026 R3.1 R3.1@11.4,36.2
  Bottom Layer w0.5: v1(2.028,78.027) 2.028,43.872 v1(7.5,38.4)
VCC: J7.A1 J7.A2 J7.A3 J7.A4 J7.A5 MD2.27 | length 76.8
  Bottom Layer w0.254: J7.A1 J7.A2 J7.A3 J7.A4 J7.A5 69.707,6.043 74.293,6.043 75.75,7.5 75.75,30.25 81.57,36.07 MD2.27
VSS: J9.1 MD2.30 pad.2@97.75,44.5 | length 45.5
  Top Layer w0.5: MD2.30 MD2.30@88.645,43.845 ; J9.1 97.75,66.5 97.75,52.95 MD2.30@88.645,43.845 ; pad.2@97.75,44.5 97.595,43.845 MD2.30@88.645,43.845
pads on no net: J7.S1 J7.S2 MD1.1 MD1.2 MD1.3 MD1.6 MD1.7 MD1.9 MD1.10 MD1.11 MD1.18 MD1.20 MD1.21 MD1.22 MD1.23 MD1.24 MD1.25 MD1.26 MD1.27 MD1.28 MD2.1 MD2.2 MD2.3 MD2.18 MD2.25 MD2.26 MD2.28

## Silkscreen, mask and mechanical layers (free items; w line width, h text height)
Top Overlay:
  text "IGN" at 21.3,85 h2.5
  text "+" at 89.7,79.117 h5
  text "-" at 89.7,51.201 h5
  text "VBAT" at 1.7,49.1 h2.5 r270
  text "+" at 96.75,45.75 h3
  text "-" at 96.75,37 h3
  text "GND" at 13.1,14.9 h2.5 r270
  text "----------------------------" at 46.6,1.4 h3 r90